# EAGLE board E75-2G4M20S-BEE (EAGLE 9.2.2)
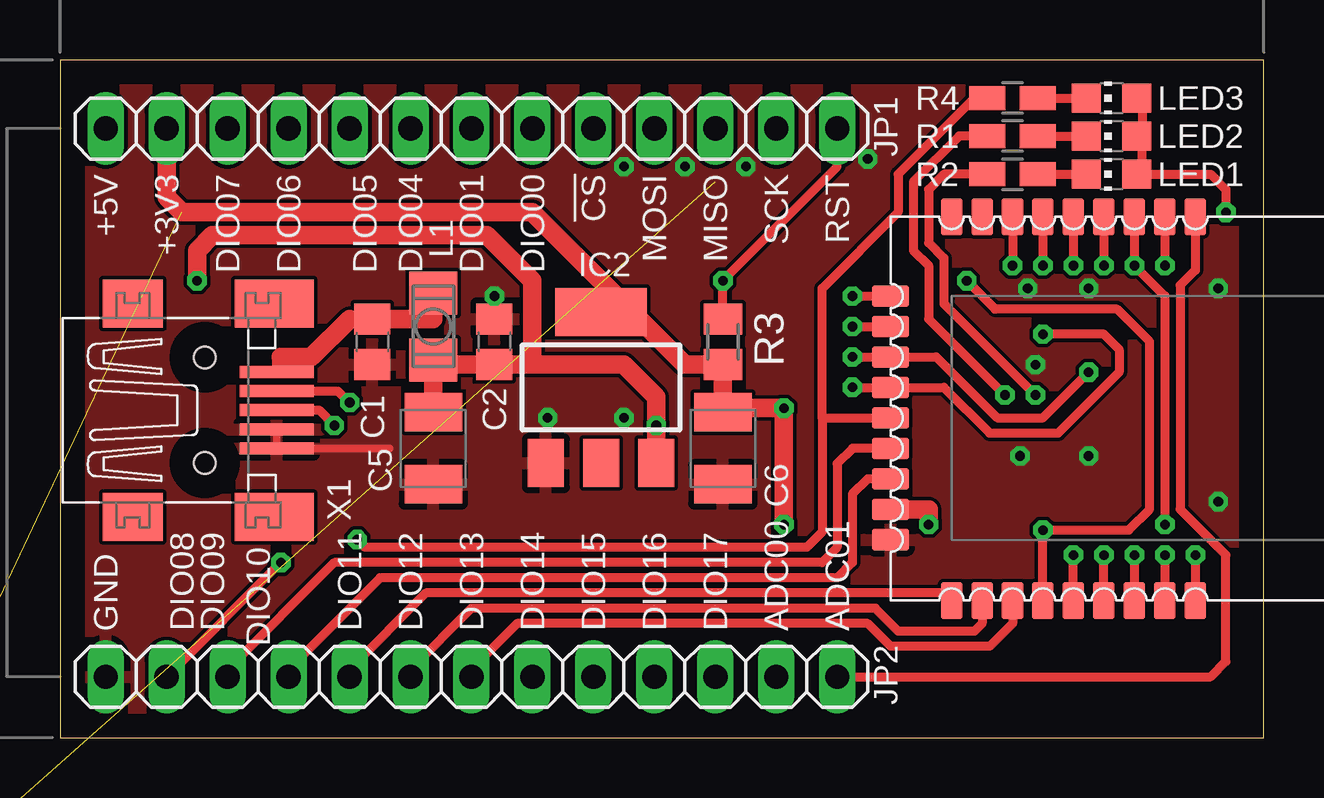
[diagram p0: board, top side]
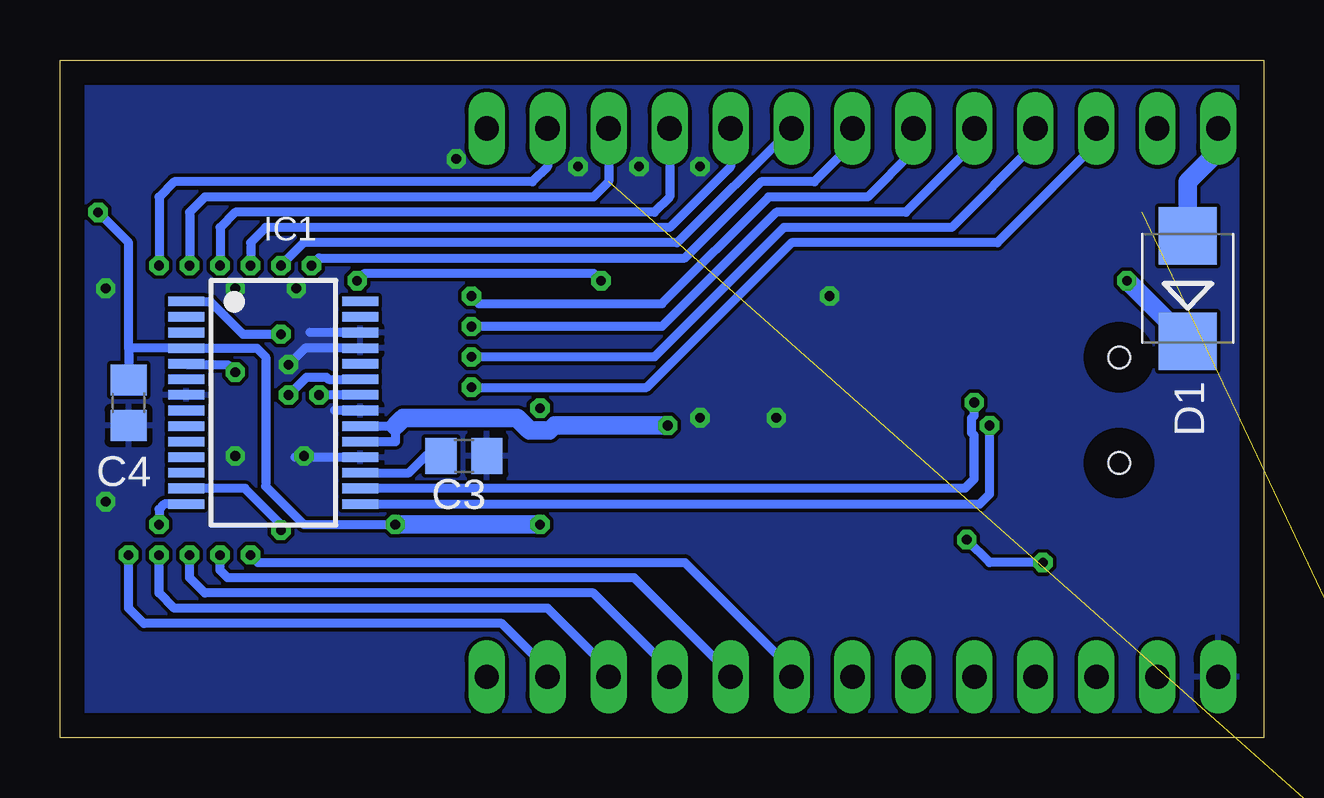
[diagram p1: board, bottom side, seen from below]

Size 50.16 x 28.26 mm. Coordinates in mm from the lower left corner, seen from the top.
Outline: 0,0 50.16,0 50.16,28.26 0,28.26 0,0
Copper layers (1*16): Top 0.035mm / dielectric 1.5mm / Bottom 0.035mm
Design rules "default": minimum track width 6mil, minimum drill 0.35mm, track to track 6mil, track to pad 6mil, pad to pad 6mil, via to via 6mil, smd to smd 6mil, copper to edge 40mil, drill to drill 6mil, minimum pad ring 10mil, minimum via ring 8mil, stop-mask expansion 4mil, vias tented up to drill 0mil, thermal gap 10mil

## Footprints (pad centres in the part's own frame; a part is rotated, then mirrored left to right if it is on the bottom)
C0805 = smd 1.3 x 1.5: 1 -0.95,0; 2 0.95,0
SMC_B = smd 1.6 x 2.4: + -1.5,0; - 1.5,0
SMB = smd 2.4 x 2.4: A 2.2,0; C -2.2,0
SSOP28 = smd 0.4 x 1.5: 1 -4.225,-3.625; 2 -3.575,-3.625; 3 -2.925,-3.625; 4 -2.275,-3.625; 5 -1.625,-3.625; 6 -0.975,-3.625; 7 -0.325,-3.625; 8 0.325,-3.625; 9 0.975,-3.625; 10 1.625,-3.625; 11 2.275,-3.625; 12 2.925,-3.625; 13 3.575,-3.625; 14 4.225,-3.625; 15 4.225,3.625; 16 3.575,3.625; 17 2.925,3.625; 18 2.275,3.625; 19 1.625,3.625; 20 0.975,3.625; 21 0.325,3.625; 22 -0.325,3.625; 23 -0.975,3.625; 24 -1.625,3.625; 25 -2.275,3.625; 26 -2.925,3.625; 27 -3.575,3.625; 28 -4.225,3.625
SOT223 = smd 1.5 x 2: 1 -2.3,-3.15; 2 0,-3.15; 3 2.3,-3.15 | smd 3.8 x 2: 4 0,3.15
1X13 = drill 1.016 long: 1 -15.24,0; 2 -12.7,0; 3 -10.16,0; 4 -7.62,0; 5 -5.08,0; 6 -2.54,0; 7 0,0; 8 2.54,0; 9 5.08,0; 10 7.62,0; 11 10.16,0; 12 12.7,0; 13 15.24,0
L3225P = smd 1.8 x 2: 1 -1.4,0; 2 1.4,0
CHIP-LED0805 = smd 1.2 x 1.2: A 0,-1.05; C 0,1.05
E75-2G4M20S = smd 0.889 x 1.524: 01 12.7,8.382; 02 11.43,8.382; 03 10.16,8.382; 04 8.89,8.382; 05 7.62,8.382; 06 6.35,8.382; 07 5.08,8.382; 08 3.81,8.382; 09 2.54,8.382; 19 2.54,-7.62; 20 3.81,-7.62; 21 5.08,-7.62; 22 6.35,-7.62; 23 7.62,-7.62; 24 8.89,-7.62; 25 10.16,-7.62; 26 11.43,-7.62; 27 12.7,-7.62 | smd 1.524 x 0.889: 10 0,5.08; 11 0,3.81; 12 0,2.54; 13 0,1.27; 14 0,0; 15 0,-1.27; 16 0,-2.54; 17 0,-3.81; 18 0,-5.08
R0805W = smd 1.5 x 1: 1 -1.052,0; 2 1.052,0
M0805 = smd 1.3 x 1.6: 1 -0.95,0; 2 0.95,0
32005-301 = smd 3.1 x 0.5: 1 3,1.6; 2 3,0.8; 3 3,0; 4 3,-0.8; 5 3,-1.6 | smd 2.5 x 2: M1 -3,-4.45; M2 -3,4.45 | smd 3.3 x 2: M3 2.9,4.45; M4 2.9,-4.45 | hole 0.9: 0,2.2; 0,-2.2

## Placement (x,y rotation side)
C1  10n  [C0805]  13.02,16.51 270 top
C2  100n  [C0805]  18.1,16.51 90 top
C3  100n  [C0805]  33.34,11.75 0 bottom
C4  100n  [C0805]  47.31,13.97 270 bottom
C5  4µ7  [SMC_B]  15.56,12.06 270 top
C6  4µ7  [SMC_B]  27.62,12.06 270 top
D1  [SMB]  3.17,18.73 90 bottom
IC1  FT232RL  [SSOP28]  41.27,13.97 270 bottom
IC2  LD117AS33TR  [SOT223]  22.54,14.61 0 top
JP1  [1X13]  17.14,25.4 180 top
JP2  [1X13]  17.14,2.54 180 top
L1  100n  [L3225P]  15.56,17.14 90 top
LED1  YE  [CHIP-LED0805]  43.81,23.5 90 top
LED2  GN  [CHIP-LED0805]  43.81,25.08 90 top
LED3  BU  [CHIP-LED0805]  43.81,26.67 90 top
N1  E75-2G4M20S  [E75-2G4M20S]  34.61,13.34 0 top
R1  270  [R0805W]  39.69,25.08 0 top
R2  270  [R0805W]  39.69,23.5 0 top
R3  10k  [M0805]  27.62,16.51 90 top
R4  270  [R0805W]  39.69,26.67 180 top
R5  10k  [M0805]  -7.62,-6.99 0 top  (outside the outline)
X1  MINI-USB-32005-301  [32005-301]  6.03,13.65 0 top

## Library data of the parts
C1-C6 = rcl; SPICEPREFIX: C
D1 = diode
IC1 = ftdichip; MPN: FT232RL; OC_FARNELL: 1146032; OC_NEWARK: 91K9918
IC2 = v-reg
JP1 JP2 = pinhead
L1 = rcl; SPICEPREFIX: L
LED1-LED3 = led
N1 = RF-Adapters
R1-R5 = rcl; SPICEPREFIX: R
X1 = con-cypressindustries; OC_FARNELL: unknown; OC_NEWARK: unknown

## Nets
!CS: JP1.5 N1.05
!RST: IC1.13 JP1.1 N1.22 R3.2
+3V3: C4.1 C6.+ IC1.4 IC2.4 JP1.12 LED1.A LED2.A LED3.A N1.17 R3.1 R5.1
ADC00: JP2.2 N1.27
ADC01: JP2.1 N1.01
DIO00: JP1.6 N1.06
DIO01: JP1.7 N1.07
DIO04: JP1.8 N1.10
DIO05: JP1.9 N1.11
DIO06: IC1.5 JP1.10 N1.12
DIO07: IC1.1 JP1.11 N1.13
DIO08: JP2.12 N1.14 R4.2
DIO09: JP2.11 N1.15
DIO10: JP2.10 N1.16
DIO11: JP2.9 N1.19
DIO12: JP2.8 N1.20
DIO13: JP2.7 N1.21
DIO14: JP2.6 N1.23
DIO15: JP2.5 N1.24
DIO16: JP2.4 N1.25
DIO17: JP2.3 N1.26
DM: IC1.16 X1.2
DP: IC1.15 X1.3
GND: C1.2 C2.2 C3.2 C4.2 C5.- C6.- IC1.7 IC1.18 IC1.21 IC1.25 IC1.26 IC2.1 JP2.13 N1.18 X1.4 X1.5
MISO: IC1.14 JP1.3 N1.03 R5.2
MOSI: JP1.4 N1.04
N$1: C3.1 IC1.17
N$2: LED3.C R4.1
N$3: C1.1 L1.2 X1.1
N$4: IC1.23 R2.1
N$5: D1.A JP1.13
N$13: IC1.22 R1.1
N$14: LED1.C R2.2
N$15: LED2.C R1.2
SCK: JP1.2 N1.02
VCC: C2.1 C5.+ D1.C IC1.19 IC1.20 IC2.3 L1.1

## Tracks (layer width: path | path; a pad name or v marks a point on that pad's centre or on a via)
!CS  (via drill 0.4)
  Top 0.381: N1.05 v42.23,19.68
  Bottom 0.381: JP1.5 22.23,23.81 24.77,21.27 41.59,21.27 42.23,20.64 v42.23,19.68
!RST  (via drill 0.4)
  Top 0.152: N1.22 40.96,6.35
  Top 0.381: 40.96,6.35 v40.96,8.66 44.54,8.66 45.4,9.53 45.4,16.51 44.05,17.87 38.97,17.87 v37.78,19.05 | R3.2 v27.62,19.05 32.38,23.81 JP1.1
  Bottom 0.381: v40.96,8.66 40.96,8.89 42.46,10.39 IC1.13 | v37.78,19.05 37.47,19.37 27.94,19.37 v27.62,19.05
+3V3  (via drill 0.4)  (1 unrouted)
  Top 0.381: LED3.A 45.09,26.67 45.09,25.08 | 45.09,25.08 LED2.A | v48.58,21.91 48.58,22.86 47.94,23.5 LED1.A 45.09,23.5 45.09,25.08 | C6.+ 27.8,13.74
  Top 0.762: N1.17 36.19,9.53 36.2,9.53 v36.2,8.89 | C6.+ R3.1 26.03,15.56 23.18,18.41 | v30.16,8.89 v30.16,13.74 27.8,13.74 | IC2.4 22.57,17.78 | IC2.4 22.54,18.1 | JP1.12 4.45,22.54 5.08,21.91 19.68,21.91 23.18,18.41 | IC2.4 23.18,18.39 23.18,18.41
  Bottom 0.381: v36.2,8.89 40.01,8.89 41.59,10.48 41.59,15.88 41.96,16.25 IC1.4 47.31,16.25 | 47.31,16.25 C4.1 | 47.31,16.25 47.31,20.64 v48.58,21.91
  Bottom 0.762: v30.16,8.89 v36.2,8.89
ADC00  (via drill 0.4)
  Top 0.381: v47.31,7.62 N1.27
  Bottom 0.381: JP2.2 29.84,2.86 31.75,4.76 46.67,4.76 47.31,5.4 v47.31,7.62
ADC01
  Top 0.381: JP2.1 47.94,2.54 48.58,3.17 48.58,7.62 46.67,9.53 46.67,18.86 47.31,19.5 N1.01
DIO00  (via drill 0.4)
  Top 0.381: N1.06 v40.96,19.68
  Bottom 0.381: JP1.6 24.45,20.64 40.01,20.64 v40.96,19.68
DIO01  (via drill 0.4)
  Top 0.381: N1.07 v39.69,19.68
  Bottom 0.381: JP1.7 17.14,24.77 18.73,23.18 20.95,23.18 24.13,20 39.37,20 v39.69,19.68
DIO04  (via drill 0.4)
  Top 0.381: v33.02,18.41 N1.10
  Bottom 0.381: JP1.8 14.61,24.45 16.51,22.54 20.64,22.54 25.08,18.1 32.7,18.1 v33.02,18.41
DIO05  (via drill 0.4)
  Top 0.381: v33.02,17.14 N1.11
  Bottom 0.381: JP1.9 12.06,24.77 14.92,21.91 20.32,21.91 25.08,17.14 v33.02,17.14
DIO06  (via drill 0.4)
  Top 0.381: v33.02,15.88 N1.12 36.51,15.88 39.05,13.34 40.96,13.34 v42.86,15.24
  Bottom 0.381: JP1.10 9.53,24.77 13.02,21.27 20,21.27 25.4,15.88 v33.02,15.88 | v42.86,15.24 43.18,15.56 44.86,15.56 IC1.5
DIO07  (via drill 0.4)
  Top 0.381: v33.02,14.61 N1.13 36.83,14.61 38.73,12.7 41.59,12.7 44.13,15.24 44.13,16.19 43.5,16.83 v40.96,16.83
  Bottom 0.381: JP1.11 6.99,24.77 11.11,20.64 19.68,20.64 25.72,14.61 v33.02,14.61 | IC1.1 43.91,18.2 42.55,16.83 v40.96,16.83
DIO08  (via drill 0.4)
  Top 0.381: R4.2 38.1,26.67 34.92,23.5 34.92,21.91 31.75,18.73 31.75,13.34 | 31.75,13.34 N1.14 | JP2.12 v9.21,7.3 | v12.38,8.26 12.7,7.94 31.11,7.94 31.75,8.57 31.75,13.34
  Bottom 0.381: v9.21,7.3 11.43,7.3 v12.38,8.26
DIO09
  Top 0.152: N1.15 34.29,12.07
  Top 0.381: 34.29,12.07 33.02,12.07 32.38,11.43 32.38,7.94 31.75,7.3 11.43,7.3 6.99,2.86 JP2.11
DIO10
  Top 0.381: JP2.10 9.53,2.86 13.34,6.67 32.38,6.67 33.02,7.3 33.02,10.16 33.66,10.8 N1.16
DIO11
  Top 0.152: N1.19 37.15,6.04
  Top 0.381: 37.15,6.04 15.24,6.04 12.06,2.86 JP2.9
DIO12
  Top 0.152: N1.20 38.42,6.04
  Top 0.381: 38.42,6.04 38.42,4.76 38.1,4.45 34.92,4.45 33.97,5.4 17.14,5.4 14.61,2.86 JP2.8
DIO13
  Top 0.152: N1.21 39.69,6.04
  Top 0.381: 39.69,6.04 39.69,4.76 38.73,3.81 34.61,3.81 33.66,4.76 19.05,4.76 17.14,2.86 JP2.7
DIO14  (via drill 0.4)
  Top 0.152: N1.23 42.23,6.04
  Top 0.381: 42.23,6.04 v42.23,7.62
  Bottom 0.381: v42.23,7.62 41.91,7.3 24.13,7.3 19.68,2.86 JP2.6
DIO15  (via drill 0.4)
  Top 0.381: N1.24 v43.5,7.62
  Bottom 0.381: JP2.5 22.23,2.65 26.25,6.67 43.18,6.67 43.5,6.99 v43.5,7.62
DIO16  (via drill 0.4)
  Top 0.381: v44.77,7.62 N1.25
  Bottom 0.381: JP2.4 24.77,2.86 27.94,6.03 44.13,6.03 44.77,6.67 v44.77,7.62
DIO17  (via drill 0.4)
  Top 0.381: v46.04,7.62 N1.26
  Bottom 0.381: JP2.3 27.3,2.86 29.84,5.4 45.4,5.4 46.04,6.03 v46.04,7.62
DM  (via drill 0.4)
  Top 0.381: X1.2 11.58,14.46 v12.06,13.97 v12.07,13.98
  Bottom 0.381: IC1.16 12.46,10.39 12.07,10.79 12.07,12.61 12.18,12.71 12.18,13.33 12.07,13.43 v12.07,13.98
DP  (via drill 0.4)
  Top 0.381: X1.3 10.79,13.65 v11.43,13.02
  Bottom 0.381: v11.43,13.02 11.43,10.16 11.85,9.74 IC1.15
GND  (via drill 0.4)
  Top 0.305: 13.74,12.06 13.73,12.05 X1.5 X1.4
  Bottom 0.381: IC1.26 39.76,16.89 | IC1.25 39.95,16.25 v40.64,15.56 | IC1.21 38.73,13.64 | IC1.18 40.38,11.7
  other vias: 40.01,11.75 42.86,11.75 48.26,18.73 48.26,9.84 40.32,18.73 42.86,18.73 33.66,24.13 23.5,13.34 20.32,13.34 18.1,18.41 26.04,23.81 23.5,23.81 28.57,23.81
  pour Top: -3.49,28.57 50.8,28.57 50.8,-0.64 -3.49,-0.64
  pour Bottom: -1.59,28.57 51.44,28.57 51.44,-0.64 -1.59,-0.64
MISO  (via drill 0.4)  (1 unrouted)
  Top 0.381: N1.03 v44.77,19.68 46.04,18.41 v46.04,8.89
  Bottom 0.381: JP1.3 27.3,23.18 27.94,22.54 44.13,22.54 44.77,21.91 v44.77,19.68 | IC1.14 45.82,9.74 46.04,9.53 v46.04,8.89
MOSI  (via drill 0.4)
  Top 0.152: N1.04 43.5,21.4
  Top 0.381: 43.5,21.4 v43.5,19.68
  Bottom 0.381: JP1.4 24.77,22.54 25.4,21.91 42.86,21.91 43.5,21.27 v43.5,19.68
N$1
  Bottom 0.152: 34.92,11.75 C3.1 33.97,11.75
  Bottom 0.381: 37.97,11.04 IC1.17 35.63,11.04 34.92,11.75
N$2
  Top 0.381: R4.1 LED3.C
N$3
  Top 0.305: X1.1 9.05,15.24
  Top 0.381: X1.1 9.03,15.7 9.21,15.88 | 12.06,17.46 C1.1 | 15.55,17.46 15.56,17.46
  Top 0.762: 9.21,15.88 10.48,15.88 12.06,17.46 | C1.1 15.55,17.46 | 15.56,17.46 L1.2
N$4  (via drill 0.4)
  Top 0.381: v40.64,14.29 36.83,18.1 36.83,20 36.2,20.64 36.2,22.86 36.83,23.5 R2.1
  Bottom 0.381: IC1.23 38.97,14.95 39.06,15.03 39.89,15.03 v40.64,14.29
N$5
  Bottom 0.762: D1.A 3.17,23.18 1.91,24.45 JP1.13
N$13  (via drill 0.4)
  Top 0.381: v39.37,14.29 36.2,17.46 36.2,19.68 35.56,20.32 35.56,23.18 37.47,25.08 R1.1
  Bottom 0.381: IC1.22 v39.36,14.29 v39.37,14.29
N$14
  Top 0.381: R2.2 LED1.C
N$15
  Top 0.381: R1.2 LED2.C
SCK  (via drill 0.4)
  Top 0.381: N1.02 v46.04,19.68
  Bottom 0.381: JP1.2 29.84,23.81 30.48,23.18 45.4,23.18 46.04,22.54 v46.04,19.68
VCC  (via drill 0.4)
  Top 0.762: C5.+ L1.1 15.74,15.56 C2.1 19.68,15.56 | 19.68,15.56 23.5,15.56 24.84,14.21 v24.84,13.02 IC2.3 | v5.71,19.05 5.71,20.32 6.35,20.95 17.78,20.95 19.68,19.05 19.68,15.56
  Bottom 0.152: 36.25,12.99 36.2,12.99
  Bottom 0.381: IC1.20 36.25,12.99 36.27,13.02 | IC1.19 36.2,12.35 36.2,12.99
  Bottom 0.762: D1.C 5.69,19.05 v5.71,19.05 | v24.84,13.02 29.56,13.02 29.77,12.8 30.58,12.8 31.11,13.34 35.85,13.34 36.2,12.99

## Text on the board
tNames: +5V | +3V3 | DIO07 | DIO06 | DIO05 | DIO04 | DIO01 | DIO00 | !CS | MOSI | MISO | SCK | RST | GND | DIO08 | DIO09 | DIO10 | DIO11 | DIO12 | DIO13 | DIO14 | DIO15 | DIO16 | DIO17 | ADC00 | ADC01